# Altium PCB Main_Board.PcbDoc (part 9 of 14)
Units mm, origin at the board's own origin, x right, y up, seen from the top; angles counter-clockwise.
Board outline 142 x 82 mm, 10 copper layers (L1_Top, L2_PWR1, L3_Sig1, L4_GND1, L5_Sig2, L6_Sig3, L7_GND2, L8_Sig4, L9_GND3, L8_Bottom), stack 1.71 mm thick; 299 components, 328 nets, 2329 pads, 2908 vias.
Unrouted connection lines stored in the file: 2.
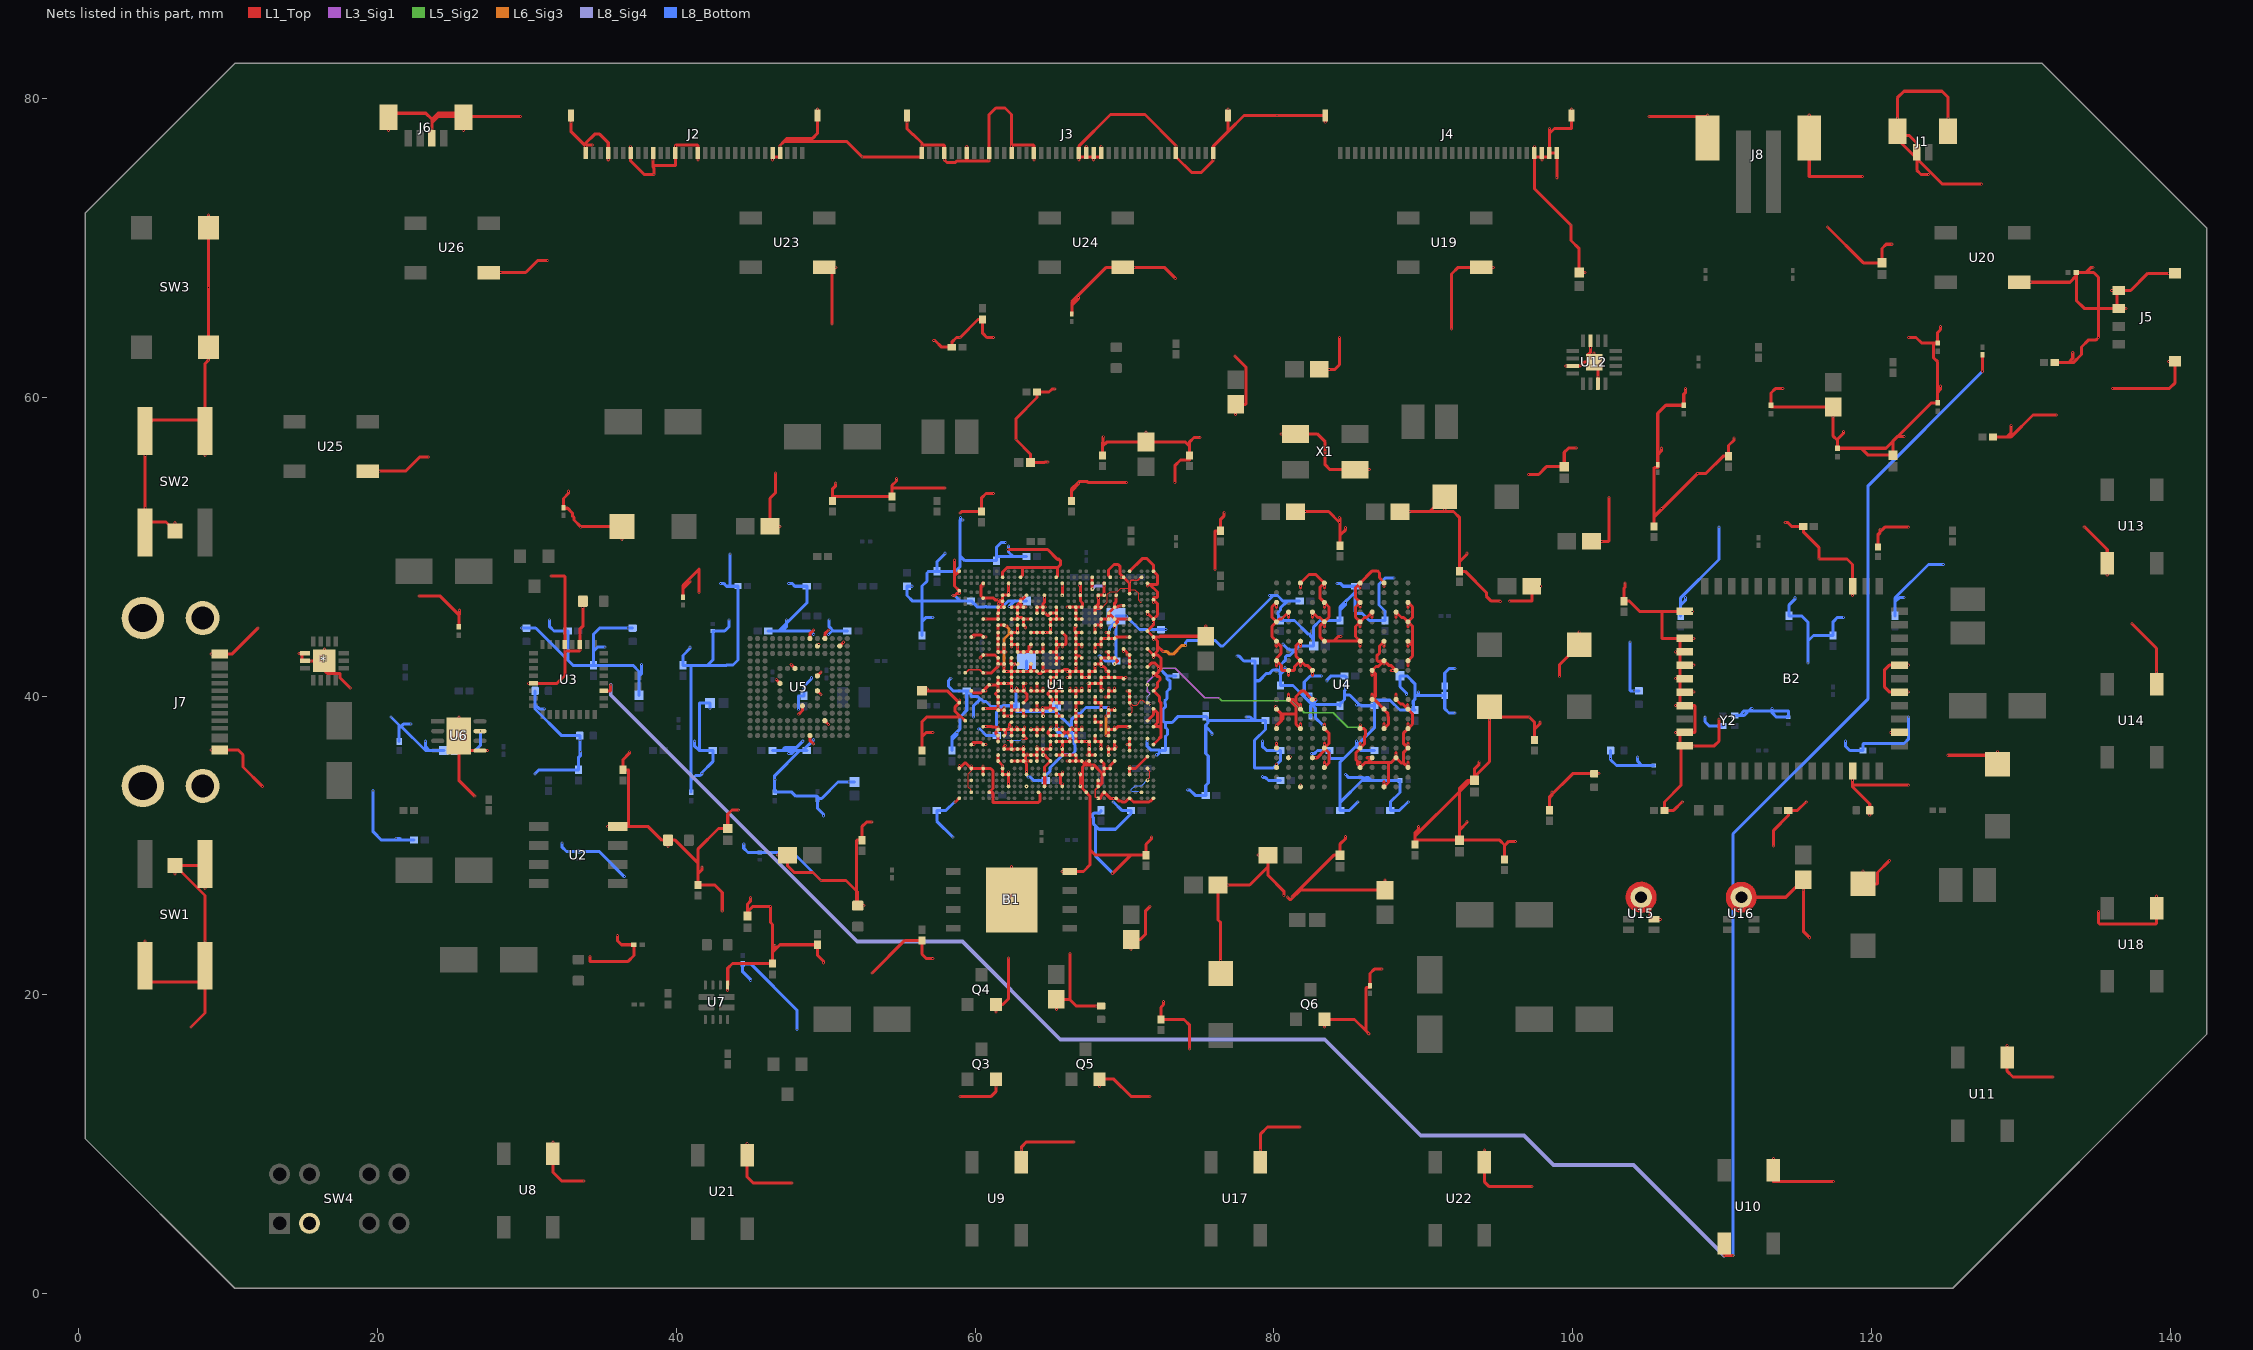
[diagram p16: the nets of this part, all layers, seen from the top]

## Via types
v1: diameter 0.1, hole 0.08, L1_Top to L8_Bottom, 1169 vias
v2: diameter 0.01, hole 0.01, L3_Sig1 to L8_Sig4, 433 vias
v3: diameter 0.01, hole 0.01, L8_Sig4 to L8_Bottom, 375 vias
v4: diameter 0.01, hole 0.01, L1_Top to L3_Sig1, 355 vias
v5: diameter 0.254, hole 0.01, L1_Top to L8_Bottom, 150 vias
v6: diameter 0.01, hole 0.01, L6_Sig3 to L8_Bottom, 129 vias
v7: diameter 0.05, hole 0.04, L1_Top to L8_Bottom, 104 vias
v8: diameter 0.01, hole 0.01, L1_Top to L5_Sig2, 89 vias
v9: diameter 0.01, hole 0.01, L1_Top to L8_Bottom, 41 vias
v10: diameter 0.1, hole 0.08, L1_Top to L3_Sig1, 17 vias
v11: diameter 0.1, hole 0.08, L1_Top to L5_Sig2, 11 vias
v12: diameter 0.1, hole 0.08, L8_Sig4 to L8_Bottom, 10 vias
v13: diameter 0.1, hole 0.08, L6_Sig3 to L8_Bottom, 9 vias
v14: diameter 1.27, hole 0.711, L1_Top to L8_Bottom, 8 vias
v15: diameter 0.4, hole 0.2, L1_Top to L8_Bottom, 4 vias
v16: diameter 0.05, hole 0.08, L1_Top to L8_Bottom, 3 vias
v17: diameter 0.05, hole 0.08, L6_Sig3 to L8_Bottom, 1 vias

## Nets (pads, with @x,y where several pads share a name; then routed paths per layer and width w, separated by ;. In a path a pad name is that pad's centre, name@x,y a point inside that pad or via, vN(x,y) a via of type N, cw(c..) or ccw(c..) an arc to the next point about the centre after c; other vN are vias at no path point) (continued)
EVCC3V3: C124.1 U6.7 | length 2.8
  L1_Top w0.203: U6.7@26.858,37.649 v1(26.894,37.649)
  L8_Bottom w0.203: C124.1@25.219,36.349 26.549,36.349 26.894,36.695 v1(26.894,37.649)
FAN_PWM: R70.1 U3.19 U10.1 | length 160.2
  L1_Top w0.203: U3.19@35.141,40.349 35.581,40.349 35.607,40.375 v1(35.607,40.734) ; U10.1@110.141,3.349 110.141,2.554 v1(110.13,2.543) 110.729,2.543 v1(110.74,2.532) ; v1(127.441,61.739) R70.1@127.441,62.841
  L8_Sig4 w0.254: v1(35.607,40.734) 35.607,40.073 52.117,23.563 59.152,23.563 65.706,17.01 83.409,17.01 89.836,10.584 96.744,10.584 98.726,8.603 104.071,8.603 v1(110.13,2.543)
  L8_Bottom w0.203: v1(110.74,2.532) 110.74,30.777 119.782,39.819 119.782,54.08 v1(127.441,61.739)
GND: *.8 *.9 *.15 B1.4 B1.9 B2.1 B2.3 B2.4 B2.5 B2.6 B2.7 B2.8 B2.10 B2.11 B2.23 B2.27 B2.30 B2.32 B2.39 C1.2 C2.2 C3.2 C4.2 C5.2 C6.2 C7.2 C8.2 C9.2 C10.2 C11.2 C12.1 C12.2 C13.2 C14.2 C15.2 C16.2 C17.2 C18.2 C19.2 C20.2 C21.2 C22.2 C23.2 C24.2 C25.2 C26.2 C27.2 C28.2 C29.2 C30.2 C31.2 C32.2 C33.2 C34.2 C35.2 C36.2 C37.2 C38.2 C39.2 C40.2 C41.2 C42.2 C43.2 C44.2 C45.2 C46.2 C47.2 C48.2 C49.2 C50.2 C51.2 C52.2 C53.2 C54.2 C55.2 C56.2 C57.2 C58.2 C59.2 C60.2 C61.2 C62.2 C63.2 C64.2 C65.2 C66.2 C67.2 C68.2 C69.2 C70.2 C71.2 C72.2 C73.2 C74.2 C75.2 C76.2 C77.2 C78.2 C79.2 C80.1 C81.2 C82.2 C83.2 C84.2 C85.2 C86.2 C87.2 C88.2 C89.2 C90.2 C91.2 C92.2 C93.2 C94.2 C95.2 C96.2 C97.2 C98.2 C99.2 C100.2 C101.2 C102.2 C103.2 C104.2 C105.2 C106.2 C107.2 C108.2 C109.2 C110.2 C111.2 C112.2 C113.2 C114.2 C115.2 C116.2 C117.2 C118.2 C119.2 C120.2 C121.2 C122.2 C123.2 C124.2 C125.2 C126.2 C127.2 C128.2 C129.2 C130.2 C131.2 C132.2 C133.2 C137.2 C138.2 C139.2 C140.2 C141.2 C142.2 C143.2 C144.2 C145.2 C146.2 C147.2 C148.2 C149.2 C150.2 C151.2 D11.1 D13.2 D14.2 D15.1 D16.1 D17.1 D18.1 J1.2 J1.3 J1.4 J2.1 J2.4 J2.7 J2.10 J2.13 J2.16 J2.26 J2.27 J2.31 J2.32 J3.1 J3.4 J3.7 J3.10 J3.13 J3.16 J3.22 J3.23 J3.24 J3.25 J3.35 J3.40 J3.41 J3.42 J4.27 J4.28 J4.29 J4.30 J4.31 J4.32 J5.3 J5.4 J5.MP1 J5.MP2 J6.3 J6.S1 J6.S2 J7.A1 J7.B1 J7.MH1 J7.MH2 J7.MH3 J7.MH4 J8.3 J8.4 Q3.2 Q4.2 Q5.2 Q6.2 R1.2 R4.1 R11.2 R16.2 R18.2 R21.2 R24.2 R25.1 R30.2 R32.2 R34.2 R38.2 R39.2 R40.2 R46.2 R49.2 R50.1 R55.2 R66.2 R67.1 R71.1 SW1.1 SW1.A SW1.A' SW1.B' SW2.1 SW2.A SW2.A' SW2.B' SW3.3 SW3.4 SW4.2 U1.A1 U1.A5 U1.A33 U1.AA5 U1.AA9 U1.AA11 U1.AA14 U1.AA17 U1.AA18 U1.AA26 U1.AB2 U1.AB5 U1.AB10 U1.AB11 U1.AB13 U1.AB14 U1.AB16 U1.AB17 U1.AB18 U1.AB20 U1.AB22 U1.AB24 U1.AB26 U1.AB33 U1.AC1 U1.AC8 U1.AC9 U1.AC10 U1.AC14 U1.AC17 U1.AC18 U1.AC19 U1.AC20 U1.AC21 U1.AC22 U1.AC23 U1.AC24 U1.AC25 U1.AC26 U1.AC29 U1.AD5 U1.AD9 U1.AD11 U1.AD13 U1.AD14 U1.AD16 U1.AD17 U1.AD19 U1.AD22 U1.AD24 U1.AD25 U1.AE2 U1.AE10 U1.AE11 U1.AE14 U1.AE17 U1.AE24 U1.AE32 U1.AF1 U1.AF5 U1.AF8 U1.AF9 U1.AF10 U1.AF13 U1.AF14 U1.AF15 U1.AF16 U1.AF17 U1.AF18 U1.AF19 U1.AF20 U1.AF21 U1.AF22 U1.AF23 U1.AF24 U1.AF25 U1.AF26 U1.AF29 U1.AG9 U1.AG11 U1.AG14 U1.AG15 U1.AG16 U1.AG17 U1.AG18 U1.AG20 U1.AG22 U1.AG24 U1.AG25 U1.AG26 U1.AH2 U1.AH5 U1.AH8 U1.AH10 U1.AH11 U1.AH12 U1.AH13 U1.AH14 U1.AH15 U1.AH16 U1.AH17 U1.AH18 U1.AH24 U1.AH26 U1.AJ1 U1.AJ5 U1.AJ8 U1.AJ9 U1.AJ10 U1.AJ12 U1.AJ16 U1.AJ18 U1.AJ19 U1.AJ20 U1.AJ22 U1.AJ23 U1.AJ24 U1.AJ25 U1.AJ29 U1.AJ31 U1.AK5 U1.AK9 U1.AK11 U1.AK12 U1.AK14 U1.AK15 U1.AK16 U1.AK17 U1.AK19 U1.AK20 U1.AK21 U1.AK22 U1.AK26 U1.AL2 U1.AL8 U1.AL10 U1.AL12 U1.AL13 U1.AL14 U1.AL15 U1.AL18 U1.AL20 U1.AL21 U1.AL22 U1.AL23 U1.AL24 U1.AL26 U1.AM2 U1.AM5 U1.AM8 U1.AM9 U1.AM11 U1.AM26 U1.AM29 U1.AM31 U1.AM33 U1.AN5 U1.AN9 U1.AN13 U1.AN16 U1.AN17 U1.AN19 U1.AN22 U1.AN25 U1.AN26 U1.AN29 U1.AP2 U1.AP10 U1.AP31 U1.AR10 U1.AR13 U1.AR16 U1.AR19 U1.AR22 U1.AR25 U1.AT3 U1.AT9 U1.AT12 U1.AT20 U1.AT28 U1.AT31 U1.AU1 U1.AU5 U1.AU7 U1.AU10 U1.AU33 U1.B3 U1.B6 U1.B8 U1.B11 U1.B17 U1.B23 U1.B26 U1.C2 U1.C9 U1.C11 U1.C13 U1.C16 U1.C25 U1.C29 U1.D5 U1.D11 U1.D33 U1.E1 U1.E7 U1.E9 U1.E10 U1.E13 U1.E16 U1.E19 U1.E22 U1.E25 U1.E26 U1.E29 U1.F6 U1.F23 U1.F26 U1.G2 U1.G8 U1.G10 U1.G11 U1.G13 U1.G14 U1.G15 U1.G17 U1.G19 U1.G20 U1.G22 U1.G23 U1.G24 U1.G25 U1.G26 U1.H1 U1.H5 U1.H9 U1.H11 U1.H14 U1.H17 U1.H18 U1.H19 U1.H20 U1.H23 U1.H26 U1.H29 U1.J8 U1.J9 U1.J10 U1.J13 U1.J14 U1.J16 U1.J17 U1.J18 U1.J21 U1.J22 U1.J23 U1.J24 U1.J26 U1.K2 U1.K8 U1.K10 U1.K11 U1.K14 U1.K18 U1.K22 U1.K23 U1.K25 U1.K26 U1.L1 U1.L5 U1.L9 U1.L11 U1.L13 U1.L14 U1.L16 U1.L18 U1.L19 U1.L20 U1.L21 U1.L23 U1.L24 U1.L26 U1.L29 U1.L31 U1.M8 U1.M9 U1.M10 U1.M14 U1.M17 U1.M24 U1.M26 U1.N2 U1.N6 U1.N10 U1.N11 U1.N13 U1.N14 U1.N16 U1.N17 U1.N19 U1.N21 U1.N23 U1.N24 U1.N25 U1.N26 U1.P1 U1.P5 U1.P9 U1.P11 U1.P14 U1.P17 U1.P18 U1.P19 U1.P20 U1.P21 U1.P22 U1.P23 U1.P25 U1.P26 U1.P29 U1.R5 U1.R8 U1.R9 U1.R10 U1.R13 U1.R14 U1.R16 U1.R17 U1.R24 U1.R26 U1.T2 U1.T5 U1.T8 U1.T10 U1.T11 U1.T14 U1.T17 U1.T19 U1.T21 U1.T23 U1.T24 U1.T25 U1.T26 U1.U1 U1.U9 U1.U11 U1.U12 U1.U13 U1.U14 U1.U15 U1.U16 U1.U17 U1.U18 U1.U19 U1.U20 U1.U21 U1.U22 U1.U23 U1.U24 U1.U25 U1.U29 U1.U32 U1.V6 U1.V8 U1.V9 U1.V10 U1.V12 U1.V13 U1.V15 U1.V17 U1.V18 U1.V24 U1.V26 U1.W2 U1.W10 U1.W11 U1.W12 U1.W18 U1.W20 U1.W22 U1.W24 U1.W25 U1.W26 U1.W28 U1.Y1 U1.Y5 U1.Y8 U1.Y9 U1.Y10 U1.Y12 U1.Y13 U1.Y14 U1.Y15 U1.Y16 U1.Y17 U1.Y18 U1.Y19 U1.Y20 U1.Y21 U1.Y22 U1.Y23 U1.Y24 U1.Y26 U1.Y29 U1.Y31 U2.4 U3.5 U3.27 U3.29 U4.A3 U4.A10 U4.AB3 U4.AB5 U4.AB8 U4.AB10 U4.C1 U4.C5 U4.C8 U4.C12 U4.D2 U4.D4 U4.D9 U4.D11 U4.E1 U4.E5 U4.E8 U4.E12 U4.G1 U4.G3 U4.G5 U4.G8 U4.G10 U4.G12 U4.J1 U4.J3 U4.J10 U4.J12 U4.K2 U4.K4 U4.K9 U4.K11 U4.N2 U4.N4 U4.N9 U4.N11 U4.P1 U4.P3 U4.P10 U4.P12 U4.T1 U4.T3 U4.T5 U4.T8 U4.T10 U4.T12 U4.V1 U4.V5 U4.V8 U4.V12 U4.W2 U4.W4 U4.W9 U4.W11 U4.Y1 U4.Y5 U4.Y8 U4.Y12 U5.A6 U5.C4 U5.E7 U5.G5 U5.H10 U5.J5 U5.K8 U5.N2 U5.N5 U5.P4 U5.P6 U6.5 U6.9 U7.9 U8.3 U9.3 U10.3 U11.3 U12.3 U12.11 U12.15 U12.17 U13.3 U14.3 U15.4 U15.5 U16.5 U17.3 U18.3 U19.3 U20.3 U21.3 U22.3 U23.3 U24.3 U25.3 U26.3 X1.2 X1.4 Y2.2 Y2.4 | length 1585.6
  L1_Top w0.04: U1.AT31@59.741,33.549 59.701,33.589 59.701,33.756 59.556,33.901 59.556,34.332 ; U1.AP31@59.741,34.349 59.725,34.332 59.556,34.332 ; 59.94,35.149 59.908,35.149 59.556,34.798 59.556,34.332 ; v4(62.095,37.025) 62.162,37.025 62.191,37.054 62.251,37.054 62.316,36.989 62.401,36.989 U1.AH24@62.441,36.949 ; v4(63.13,37.122) 63.408,37.122 63.445,37.158 ; 68.041,45.815 68.41,45.815 68.861,46.266 68.861,46.802 69.043,46.984 69.51,46.984 69.74,47.214 70.241,47.214 70.325,47.13 70.694,47.13 70.941,46.883 70.941,46.416 71.073,46.284 v4(71.148,46.284) ; U1.AD5@70.341,38.749 70.341,38.793 70.506,38.958 70.506,39.095 70.508,39.097 70.508,39.218 70.382,39.345 70.382,39.509 U1.AB5@70.341,39.549 70.385,39.549 70.55,39.384 70.81,39.384 70.941,39.516 70.941,39.566 71.014,39.654 cw(c71.141,39.549) 71.246,39.677 ; v4(70.95,33.55) U1.AT3@71.141,33.549 ; 71.246,39.677 71.344,39.597 71.437,39.597 71.485,39.549 U1.AB2@71.541,39.549 ; v2(71.541,34.371) 71.541,34.393 71.706,34.558 71.706,34.94 71.541,35.105 U1.AM2@71.541,35.149
  L1_Top w0.1: U1.U32@59.341,41.549 59.382,41.549 59.579,41.746 60.304,41.746 60.501,41.549 U1.U29@60.541,41.549 ; v1(68.166,33.149) 68.046,33.269 68.046,33.714 U1.AR10@68.241,33.909 ; v1(70.341,47.627) 70.469,47.754 70.906,47.754 71.101,47.949 U1.B3@71.141,47.949
  L1_Top w0.2: v1(43.441,20.299) U7.9@43.441,20.649

## Text inside footprints (layer, text, board x,y; h text height)
U3: Top Overlay "*" at 29.189,43.653 h0.3; Top 3D Body "*" at 30.678,43.272 h0.3